# Altium PCB OSU_Robotics_Kids.PcbDoc (part 3 of 3)
Units mm, origin at the board's own origin, x right, y up, seen from the top; angles counter-clockwise.
Board outline 80 x 40 mm, 2 copper layers (Top Layer, Bottom Layer); 19 components, 0 nets, 262 pads, 0 vias.
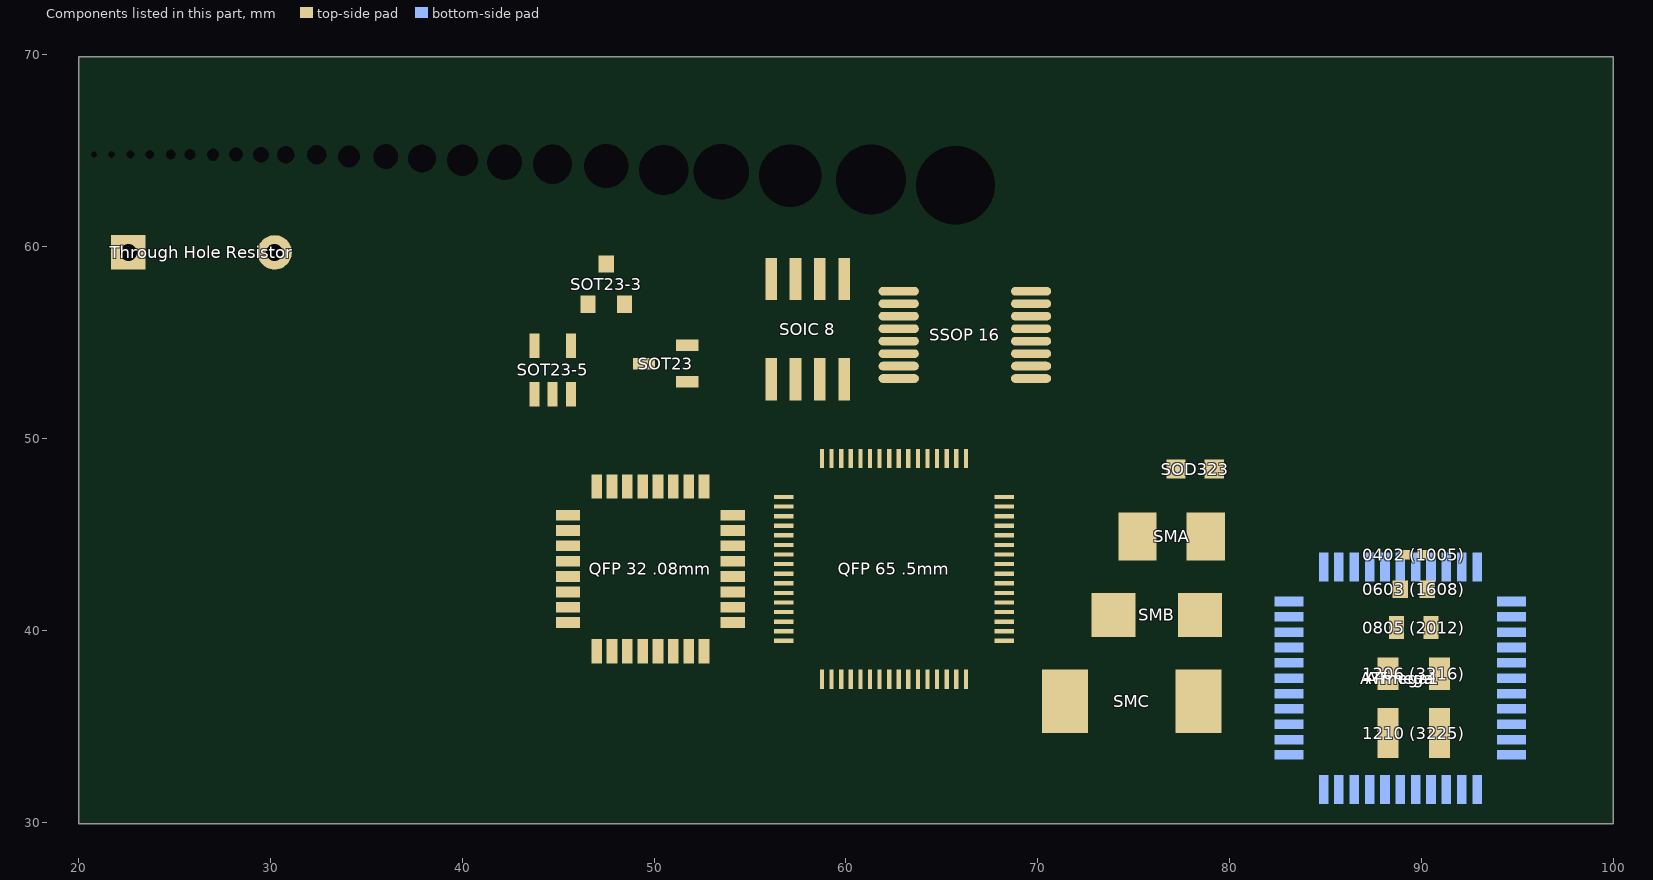
[diagram p3: the components of this part, seen from the top]

## Other copper (continued)
Bottom Layer:
  text "Mailing: 204 Rogers Hall / Corvallis, OR 97331" at 98.4,52.5 h1.52
  text "Email: osurcofficers@engr.oregonstate.edu" at 98.1,50.3 h1
  text "Make More Robot!" at 94,46.8 h1.52

## Silkscreen, mask and mechanical layers (free items; w line width, h text height)
Top Overlay:
  circle w0.254: c57.8,37.3 r0.224
  circle w0.254: c91.98,56.562 r1.606
  circle w0.254: c92.016,63.062 r1.606
  circle w0.254: c86.22,63.062 r1.606
  circle w0.254: c86.24,56.062 r1.606
  lines w0.25: 22.583,44.531 25.296,44.531 ; 23.853,43.101 23.853,44.531 ; 26.175,43.101 21.675,43.101 23.853,46.984 26.175,43.101 ; 27.583,44.526 30.296,44.526 ; 28.853,43.096 28.853,44.526 ; 32.594,44.546 35.307,44.546 ; 33.864,43.117 33.864,44.546 ; 72.061,55.22 ccw(c77,56) 81.893,54.97 ; 72.2,56.9 cw(c77.093,55.87) 82.012,56.764 ; 73.74,64.694 76.28,64.694 ; 74,55.5 ccw(c76.959,55.993) 79.911,55.457 ; 74.09,56.728 cw(c77,56) 79.885,56.824 ; 75.7,55 ccw(c76.986,55.772) 78.379,55.215 ; 75.8,56.7 cw(c77.086,55.928) 78.372,56.7 ; 77.296,63.678 77.296,65.71 ; 79.836,64.694 77.296,64.694 ; 84.188,63.062 85.966,63.062 ; 84.208,56.062 85.986,56.062 ; 85.966,62.554 86.728,61.792 86.728,61.284 ; 85.986,55.554 86.748,54.792 ; 85.986,56.57 86.748,57.332 86.748,57.84 ; 86.347,63.697 86.728,64.078 86.728,64.332 86.728,64.84 ; 86.748,54.284 86.748,54.792 ; 89.186,55.8 90.964,55.8 90.964,57.578 ; 89.222,64.078 91,64.078 91,62.3 ; 91.472,55.292 91.472,55.8 ; 91.472,55.546 92.234,55.546 ; 91.472,56.308 91.472,56.816 ; 91.472,56.562 91.98,56.562 ; 91.472,57.324 91.472,57.832 ; 91.472,57.578 92.234,57.578 92.234,58.848 ; 91.508,61.792 91.508,62.3 ; 91.508,62.046 92.27,62.046 92.27,60.776 ; 91.508,62.808 91.508,63.316 ; 91.508,63.062 92.016,63.062 ; 91.508,63.824 91.508,64.332 ; 91.508,64.078 92.27,64.078 ; 91.762,62.808 92.016,63.062 ; 91.762,63.316 92.016,63.062 ; 92.234,54.276 92.234,56.562 91.726,56.562 ; 92.27,63.062 92.27,65.348 ; 77.296,64.694 76.28,63.678 76.28,65.71 77.296,64.694 ; 86.748,54.792 86.494,54.792 86.748,55.046 86.748,54.792 ; 91.726,56.562 91.98,56.308 91.98,56.816 91.726,56.562 ; 26.675,43.096 31.175,43.096 28.853,46.979 26.675,43.096 ; 31.686,43.117 36.186,43.117 33.864,47 31.686,43.117 ; 86.22,63.57 86.474,63.57 86.22,63.824 86.22,63.57
  lines w0.4: 85.966,61.792 85.966,64.332 ; 85.986,54.792 85.986,57.332
  text "7" at 60.948,65.471 h1.5
  text "28" at 20.054,65.461 h1.5
  text "26" at 22.086,65.461 h1.5
  text "24" at 24.118,65.461 h1.5
  text "22" at 26.277,65.461 h1.5
  text "20" at 28.817,65.461 h1.5
  text "18" at 31.738,65.461 h1.5
  text "17" at 33.516,65.461 h1.5
  text "16" at 35.294,65.461 h1.5
  text "15" at 37.199,65.461 h1.5
  text "14" at 39.231,65.461 h1.5
  text "13" at 41.517,65.461 h1.5
  text "12" at 44.057,65.461 h1.5
  text "11" at 46.851,65.461 h1.5
  text "10" at 49.899,65.461 h1.5
  text "9" at 53.201,65.461 h1.5
  text "8" at 56.884,65.461 h1.5
  text "6" at 65.393,65.461 h1.5
  text "E" at 85.712,65.094 h1.52
  text "+" at 91.254,65.094 h1.52
  text "S" at 92.778,65.094 h1.52
  text "100" at 96.3,65.1 h2.54
  text "+" at 73.486,64.948 h1.52
  text "+" at 87.236,64.586 h1.52
  text "G" at 89.222,64.586 h1.52
  text "Anode" at 72.978,63.678 h1.14
  text "Cathode" at 77.804,63.678 h1.14
  text "80" at 96.6,63.4 h2.03
  text "B" at 83.68,63.316 h1.52
  text "27" at 20.943,62.921 h1.5
  text "25" at 22.975,62.921 h1.5
  text "23" at 25.007,62.921 h1.5
  text "21" at 27.42,62.921 h1.5
  text "19" at 30.087,62.921 h1.5
  text "PMOS" at 88.46,62.554 h1.27 r315
  text "60" at 96.7,62.2 h1.52
  text "PNP" at 83.172,62.046 h1.52 r315
  text "AWG" at 33,62 h2.5
  text "10mm" at 75.3,61.3 h1.5
  text "40 mil" at 96.7,61.3 h1.02
  text "Resistor Color Code:" at 32.5,60.5 h0.5
  text "D" at 92.778,60.268 h1.52
  text "C" at 85.712,60.014 h1.52
  text "6mm" at 75.8,59.2 h1.5
  text "Font Size" at 96,58.7 h2.25 r90
  text "+" at 91.218,58.594 h1.52
  text "D" at 92.742,58.594 h1.52
  text "C" at 85.732,58.094 h1.52
  text "3mm" at 75.8,57.6 h1.5
  text "+" at 87.256,57.586 h1.52
  text "B" at 83.7,56.316 h1.52
  text "G" at 88.932,56.308 h1.52
  text "Through Hole Cap" at 71.9,55.8 h1.5
  text "NPN" at 82.684,55.3 h1.52 r315
  text "NMOS" at 89.5,55 h1.27 r315
  text "S" at 92.742,53.768 h1.52
  text "E" at 85.732,53.014 h1.52
  text "Color  / Black / Brown  / Red / Orange / Yellow / Green / Blue / Violet / Grey / White" at 32.5,50.5 h0.5
  text "Value / 0 / 1  / 2 / 3 / 4 / 5 / 6 / 7 / 8 / 9" at 35.5,50.5 h0.53
  text "Multipler / 1 / 10  / 100 / 1K / 10K / 100K / 1M" at 38.5,50.5 h0.5
  text "Diodes" at 74.5,49.5 h1
  text "R/L/C" at 89.1,47.6 h1
  text "Imperial (metric)" at 87.6,46 h0.7
  text "ve" at 33.264,44.846 h1.52
  text "P" at 23.472,44.825 h1.52
  text "V" at 28.472,44.82 h1.52
  text "λ" at 32.764,43.346 h1.52
  text "f" at 34.464,43.346 h1.52
  text "I" at 22.964,43.301 h1.52
  text "V" at 24.361,43.301 h1.52
  text "I" at 27.964,43.296 h1.52
  text "R" at 29.361,43.296 h1.52
  text "1mm = 39.4mil" at 48.71,34.31 h1.02
  text "1kg = 2.2lbs" at 55.822,34.31 h1.02
  text "1 HP = 746 Watts" at 61.664,34.31 h1.02
  text "1m = 3.3ft" at 48.71,33.04 h1.02
  text "1W = 1J/s" at 55.822,33.04 h1.02
  text "°C = (°F - 32)/1.8" at 61.664,33.04 h1.02
Bottom Overlay:
  drawing of 42389 lines, arcs and shapes, not listed
Top Solder:
  rectangle: 21.6,47.6 31.6,57.6
  rectangle: 32,48.9 33,49.9
  lines w0.127: 20.5,36.2 21.9,34.8 33,34.8 ; 33,34.8 33,34.8
  lines w0.254: 20.32,29.872 20.32,31.65 ; 20.5,36.9 22,35.4 33,35.4 ; 21,68.9 21,69.9 ; 22,68.9 22,69.9 ; 22.86,29.872 22.86,31.65 ; 22.96,38.14 22.98,38.12 ; 23,68.9 23,69.9 ; 24,68.9 24,69.9 ; 25,67.9 25,69.9 ; 25.4,29.872 25.4,31.65 ; 26,68.9 26,69.9 ; 27,68.9 27,69.9 ; 27.94,29.872 27.94,31.65 ; 28,68.9 28,69.9 ; 29,68.9 29,69.9 ; 30,66.9 30,69.9 ; 30.48,29.872 30.48,31.65 ; 31,68.9 31,69.9 ; 32,68.9 32,69.9 ; 33,68.9 33,69.9 ; 33.02,29.872 33.02,32.412 ; 34,68.9 34,69.9 ; 35,67.9 35,69.9 ; 35.56,29.872 35.56,31.65 ; 36,68.9 36,69.9 ; 37,68.9 37,69.9 ; 38,68.9 38,69.9 ; 38.1,29.872 38.1,31.65 ; 39,68.9 39,69.9 ; 40,66.9 40,69.9 ; 40.64,29.872 40.64,31.65 ; 41,68.9 41,69.9 ; 42,68.9 42,69.9 ; 43,68.9 43,69.9 ; 43.18,29.872 43.18,31.65 ; 44,68.9 44,69.9 ; 45,67.9 45,69.9 ; 45.72,29.872 45.72,32.92 ; 46,68.9 46,69.9 ; 47,68.9 47,69.9 ; 48,68.9 48,69.9 ; 48.26,29.872 48.26,31.65 ; 49,68.9 49,69.9 ; 50,66.9 50,69.9 ; 50.8,29.872 50.8,31.65 ; 51,68.9 51,69.9 ; 52,68.9 52,69.9 ; 53,68.9 53,69.9 ; 53.34,29.872 53.34,31.65 ; 54,68.9 54,69.9 ; 55,67.9 55,69.9 ; 55.88,29.872 55.88,31.65 ; 56,68.9 56,69.9 ; 57,68.9 57,69.9 ; 58,68.9 58,69.9 ; 58.42,29.872 58.42,31.65 ; 59,68.9 59,69.9 ; 60,66.9 60,69.9 ; 60.96,29.872 60.96,32.412 ; 61,68.9 61,69.9 ; 62,68.9 62,69.9 ; 63,68.9 63,69.9 ; 63.5,29.872 63.5,31.65 ; 64,68.9 64,69.9 ; 65,67.9 65,69.9 ; 66,68.9 66,69.9 ; 66.04,29.872 66.04,31.65 ; 67,68.9 67,69.9 ; 68,68.9 68,69.9 ; 68.58,29.872 68.58,31.65 ; 69,68.9 69,69.9 ; 70,66.9 70,69.9 ; 71,68.9 71,69.9 ; 71.12,29.872 71.12,31.65 ; 72,68.9 72,69.9 ; 73,68.9 73,69.9 ; 73.66,29.872 73.66,32.92 ; 74,68.9 74,69.9 ; 75,67.9 75,69.9 ; 76,68.9 76,69.9 ; 76.2,29.872 76.2,31.65 ; 77,68.9 77,69.9 ; 78,68.9 78,69.9 ; 78.74,29.872 78.74,31.65 ; 79,68.9 79,69.9 ; 80,66.9 80,69.9 ; 81,68.9 81,69.9 ; 81.28,29.872 81.28,31.65 ; 82,68.9 82,69.9 ; 83,68.9 83,69.9 ; 83.82,29.872 83.82,31.65 ; 84,68.9 84,69.9 ; 85,67.9 85,69.9 ; 86,68.9 86,69.9 ; 86.36,29.872 86.36,31.65 ; 87,68.9 87,69.9 ; 88,68.9 88,69.9 ; 88.9,29.872 88.9,32.412 ; 89,68.9 89,69.9 ; 90,66.9 90,69.9 ; 91,68.9 91,69.9 ; 91.44,29.872 91.44,31.65 ; 92,68.9 92,69.9 ; 93,68.9 93,69.9 ; 93.98,29.872 93.98,31.65 ; 94,68.9 94,69.9 ; 95,67.9 95,69.9 ; 96,68.9 96,69.9 ; 96.52,29.872 96.52,31.65 ; 97,68.9 97,69.9 ; 98,68.9 98,69.9 ; 99,68.9 99,69.9 ; 99.06,29.872 99.06,31.65 ; 20.5,37.7 20.5,37.7 ; 20.5,38.5 20.5,38.5
  lines w0.305: 20.5,37.7 22.2,36 33,36
  lines w0.381: 20.5,38.5 22.4,36.6 32.9,36.6
  lines w0.508: 20.5,39.5 22.7,37.3 32.9,37.3
  lines w0.635: 20.41,40.69 22.96,38.14 ; 22.98,38.12 32.9,38.12
  lines w1.27: 20.74,41.98 23.33,39.39 32.5,39.39
  text "0" at 20.5,66.9 h1.52
  text "cm" at 22,66.9 h0.75
  text "1" at 30.5,66.9 h1.52
  text "2" at 40.5,66.9 h1.52
  text "3" at 50.5,66.9 h1.52
  text "4" at 60.5,66.9 h1.52
  text "5" at 70.5,66.9 h1.52
  text "6" at 80.5,66.9 h1.52
  text "7" at 90.5,66.9 h1.52
  text "1mm^2" at 33.2,49 h0.5
  text "1cm^2" at 31.9,47.6 h0.7
  text "Trace  / width" at 33.37,39.8 h0.5
  text "Max Amps / @ 10deg C Rise" at 36.61,39.743 h0.45
  text "1.27mm" at 33.38,38.99 h0.5
  text "2.9" at 36.73,38.97 h0.5
  text ".635mm" at 33.3,38.1 h0.5
  text "1.7" at 36.75,38.03 h0.5
  text ".508mm" at 33.3,37.3 h0.5
  text "1.5" at 36.73,37.17 h0.5
  text ".381mm" at 33.3,36.5 h0.5
  text "1.2" at 36.72,36.49 h0.5
  text "1" at 36.71,35.81 h0.5
  text ".305mm" at 33.3,35.8 h0.5
  text ".9" at 36.71,35.15 h0.5
  text ".254mm" at 33.3,35.1 h0.5
  text ".6" at 36.69,34.34 h0.5
  text ".127mm" at 33.3,34.3 h0.5
  text "0" at 20.32,32.16 h1.52
  text "in" at 21.83,32.16 h1
  text "1" at 46.74,32.16 h1.52
  text "2" at 74.42,32.16 h1.52
Bottom Solder:
  drawing of 1556 lines, arcs and shapes, not listed
  text "Mailing: 204 Rogers Hall / Corvallis, OR 97331" at 98.4,52.5 h1.52
  text "Email: osurcofficers@engr.oregonstate.edu" at 98.1,50.3 h1
  text "Make More Robot!" at 94,46.8 h1.52
Mechanical 1:
  the board outline again, w0.1